# Allegro board JLINK_OB_PCB_V1_0.brd
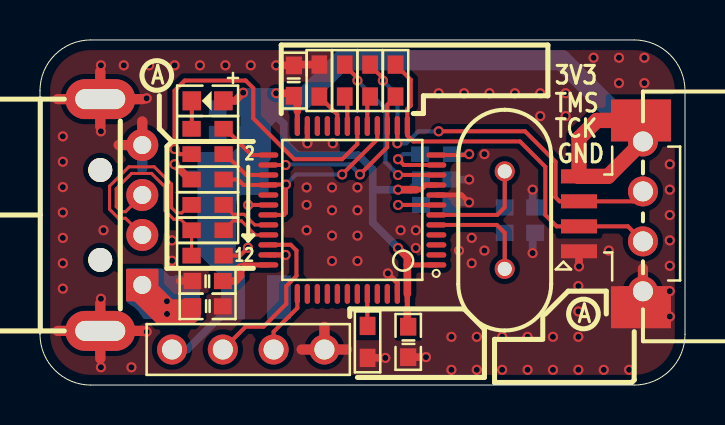
[diagram p0: board, top side]
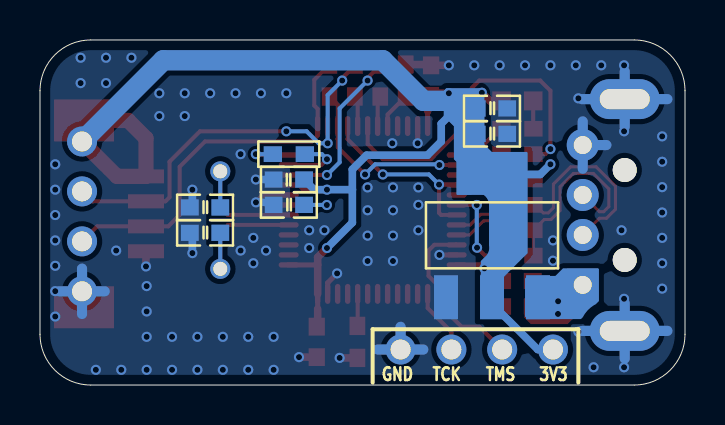
[diagram p1: board, bottom side, seen from below]

Outline 32.26 x 17.27 mm; copper layers: TOP, BOTTOM. Coordinates in mm from the lower left corner of the outline.
Outline path: 0,14.73 0,2.54 arc(0.74,0.74) 2.54,0 29.72,0 arc(31.51,0.74) 32.26,2.54 32.26,14.73 arc(31.51,16.53) 29.72,17.27 2.54,17.27 arc(0.74,16.53) 0,14.73

## Design rules (mm)
net group 90OHM: nets N04919 N04923
net group 90OHM2: nets USBD+ USBD-
net group POWER: nets 3V3 VCC_5V

## Placement (name value [footprint] x y rotation side)
C1  22pF  [C0603]  24 7.62 0 bottom
C2  22pF  [C0603]  24 8.89 0 bottom
C3  104  [C0603]  19.81 9.02 0 bottom
C4  105  [C0603]  8.38 3.94 180 top
C5  105  [C0603]  9.65 12.57 0 bottom
C6  104  [C0603]  9.65 13.84 0 bottom
C7  104  [C0603]  12.7 15.24 270 top
C8  104  [C0603]  8.38 5.21 0 top
C9  104  [C0603]  19.81 10.29 180 bottom
C10  104  [C0603]  18.41 2.16 90 top
D1  LED  [LED0603]  8.38 14.22 180 top
J1  SMT-CON-4P-1R25  [1_25_PWT_4P]  29.69 8.64 90 top
J2  SWD  [XH-2R54-4P-B]  30.15 12.19 270 top
J3  CON4  [SIP-4]  14.22 1.78 180 top
R1  100R  [R0603]  15.24 15.24 90 top
R2  100R  [R0603]  8.38 11.56 0 top
R3  100R  [R0603]  16.51 15.24 270 top
R4  100R  [R0603]  17.78 15.24 270 top
R5  100R  [R0603]  19.81 11.56 180 bottom
R6  10k  [R0603]  8.38 10.29 180 top
R7  1k  [R0603]  8.38 12.83 180 top
R8  10k  [R0603]  13.97 15.24 90 top
R9  10k  [R0603]  16.38 2.16 270 top
R10  22R  [R0603]  8.38 9.02 0 top
R11  22R  [R0603]  8.38 7.75 0 top
R12  1.5k  [R0603]  8.38 6.48 0 top
U1  STM32F103C8T6  [LQFP-48]  15.62 8.76 180 top
U2  AMS1117-3V3  [SOT-223]  9.65 7.49 180 bottom
USB1  USB_A_M  [USB-A-M-DIP]  5.12 5.01 180 top
Y1  8M  [HC-49S]  23.24 8.26 270 top

## Library data of the parts
C1-C10 = CAP NP
D1 = LED
J1 = SMT-CON-4P-1R25
J2 J3 = CON4
R1-R12 = R
U1 = STM32F103C8T6_6
U2 = AMS1117-3V3_0
USB1 = USB_A
Y1 = CRYSTAL_0

## Footprints (pads in the part's own frame, mm; a bottom-side part is the same pattern mirrored in y, then rotated)
1_25_PWT_4P
  rect 0.701x1.801 smd: 1(-1.941,2.731) 2(-0.693,2.731) 3(0.559,2.731) 4(1.808,2.731)
  rect 2.101x3 smd: 5(-4.742,-0.368) 6(4.608,-0.368)
C0603
  rect 0.889x0.813 smd: 1(-0.762,0) 2(0.762,0)
HC-49S
  round 1.001 hole 0.701: 1(-2.441,0) 2(2.441,0)
LED0603
  rect 0.93x0.95 smd: 1(-0.79,0) 2(0.79,0)
LQFP-48
  oval 1.001x0.269 smd: 1(-4.201,2.751) 2(-4.201,2.25) 3(-4.201,1.75) 4(-4.201,1.25) 5(-4.201,0.749) 6(-4.201,0.249) 7(-4.201,-0.249) 8(-4.201,-0.749) 9(-4.201,-1.25) 10(-4.201,-1.75) 11(-4.201,-2.25) 12(-4.201,-2.751) 25(4.201,-2.751) 26(4.201,-2.25) 27(4.201,-1.75) 28(4.201,-1.25) 29(4.201,-0.749) 30(4.201,-0.249) 31(4.201,0.249) 32(4.201,0.749) 33(4.201,1.25) 34(4.201,1.75) 35(4.201,2.25) 36(4.201,2.751)
  oval 0.269x1.001 smd: 13(-2.751,-4.201) 14(-2.25,-4.201) 15(-1.75,-4.201) 16(-1.25,-4.201) 17(-0.749,-4.201) 18(-0.249,-4.201) 19(0.249,-4.201) 20(0.749,-4.201) 21(1.25,-4.201) 22(1.75,-4.201) 23(2.25,-4.201) 24(2.751,-4.201) 37(2.751,4.201) 38(2.25,4.201) 39(1.75,4.201) 40(1.25,4.201) 41(0.749,4.201) 42(0.249,4.201) 43(-0.249,4.201) 44(-0.749,4.201) 45(-1.25,4.201) 46(-1.75,4.201) 47(-2.25,4.201) 48(-2.751,4.201)
R0603
  rect 0.914x0.787 smd: 1(-0.8,0) 2(0.8,0)
SIP-4
  round 1.501 hole 1.001: 1(0,0) 2(2.54,0) 3(5.08,0) 4(7.62,0)
SOT-223
  rect 1.199x2.2 smd: 1(-2.301,-3.099) 2(0,-3.099) 3(2.301,-3.099)
  rect 3.5x2.149 smd: 4(0,3.099)
USB-A-M-DIP
  round 1.199 hole 1.199 unplated: (2.101,-1.25) (2.101,-5.751)
  rect 1.6x1.6 hole 0.899: 1(0,0)
  round 1.6 hole 0.899: 2(0,-2.499) 3(0,-4.501) 4(0,-7)
  oval 3.5x1.999 hole 2.499x1.001: 5(2.101,2.301) 6(2.101,-9.299)
XH-2R54-4P-B
  round 1.501 hole 1.001: 1(0,0) 2(2.499,0) 3(5.001,0) 4(7.501,0)

## Nets
3V3: C5.2 C6.2 C7.2 C8.2 C9.2 C10.2 D1.1(A) J1.4 J1.6 J2.1 J3.4 R6.2 U1.1(VBAT) U1.9(VDDA) U1.24(VDD_1) U1.36(VDD_2) U1.48(VDD_3) U2.2(OUT0) U2.4(OUT1)
GND: C1.2 C2.2 C3.2 C4.1 C5.1 C6.1 C7.1 C8.1 C9.1 C10.1 J1.1 J1.5 J2.4 J3.1 R8.2 R9.2 U1.8(VSSA) U1.23(VSS_1) U1.35(VSS_2) U1.47(VSS_3) U2.1(GND) USB1.4(GND) USB1.5 USB1.6
VCC_5V: C4.2 U2.3(IN) USB1.1(VCC)
JTCK: J3.2 U1.37(PA14)
JTMS: J3.3 U1.34(PA13)
LED: R7.1 U1.25(PB12)
NRST: C3.1 U1.7(NRST)
TCKIN: J1.2 J2.3 R4.1 U1.13(PA3)
TCKOUT: R4.2 U1.15(PA5) U1.26(PB13)
TDIIN: R2.1 U1.18(PB0)
TDIOUT: R2.2 U1.27(PB14)
TDOIN: R6.1 U1.16(PA6) U1.28(PB15) U1.31(PA10)
TMSIN: J1.3 J2.2 R3.1 U1.14(PA4)
TMSOUT: R3.2 U1.17(PA7)
TRESIN: R5.1 U1.12(PA2)
TRESOUT: R5.2 U1.11(PA1)
TRSTIN: R1.1 U1.19(PB1)
TRSTOUT: R1.2 U1.10(PA0-WKUP)
USBD+: R11.2 U1.33(PA12)
USBD-: R10.2 U1.32(PA11)
USBD_EN: R12.2 U1.30(PA9)
N00624: R8.1 U1.20(PB2/BOOT1)
N00724: C1.1 U1.5(PD0-OSC_IN) Y1.2
N00728: C2.1 U1.6(PD1) Y1.1
N00767: R9.1 U1.44(BOOT0)
N04919: R10.1 USB1.2(D-)
N04923: R11.1 R12.1 USB1.3(D+)
N05966: D1.2(K) R7.2

Pads without a net: U1 2 3 4 21 22 29 38 39 40 41 42 43 45 46

## Via types
v1: diameter 0.508, hole 0.305, TOP to BOTTOM, 114 vias

## Routing (per net, layer and track width the routed paths; a pad name or vN(x,y) marks a point on that pad's centre or on a via; arc(x,y) is an arc through that point)
3V3: length 66.9
  TOP w0.254: v1(10.03,5.84) 10.2,6.01 U1.36 ; 18.82,9.78 19.05,9.78 19.28,10.01 U1.9 ; 18.37,6.01 18.37,6.01 U1.1 ; U1.24 12.87,13.72 ; U1.48 18.37,3.81
  TOP w0.381: C10.2 18.37,2.96 18.37,3.81 ; U1.48 18.37,6.39 v1(17.91,6.86) ; 12.87,13.72 12.87,14.31 C7.2 12.57,14.61 v1(11.81,14.61) ; C8.2 9.78,5.21 10.03,5.46 v1(10.03,5.84) ; D1.1 9.75,14.22 v1(10.16,14.63) ; R6.2 7.49,10.29 v1(6.73,11.05) ; 18.82,9.78 v1(17.91,9.78)
  TOP w0.762: J2.1 28.41,10.44 J1.4 26.96,12.35 27.85,13.24 J1.6
  BOTTOM w0.381: C9.2 18.54,9.78 v1(17.91,9.78) 16.64,9.78 ; J3.4 7.37,1.78 9.65,4.06 U2.2 ; 16.64,9.78 16.64,8.13 v1(17.91,6.86) ; 16.64,9.78 16.64,10.79 15.93,11.5 12.88,11.5 12.19,12.19 12.19,13.08 11.81,13.46 ; U2.4 9.6,10.54 7.24,10.54 v1(6.73,11.05)
  BOTTOM w1.016: 11.43,14.22 13.08,14.22 15.11,16.26 26.09,16.26 J2.1
GND: length 63.9
  TOP w0.254: U1.23 v1(13.37,12.1) ; v1(17.4,5.59) 17.87,5.12 U1.47 ; U1.8 21.09,9.51 v1(21.46,9.14) ; U1.35 v1(12.28,6.51)
  TOP w0.381: C10.1 v1(19.3,1.4) ; v1(11.81,16) C7.1 12.74,16.04 R8.2 ; J1.1 v1(26.96,5.94) ; R9.2 v1(17.27,1.36) ; 6.99,5.21 C8.1
  TOP w0.508: 3.93,12.01 USB1.4 5.12,13.2 ; 13.09,1.78 J3.1 ; J3.1 14.22,2.91 ; J3.1 15.36,1.78 ; 30.15,3.56 J2.4 ; J2.4 29.02,4.69 ; J2.4 30.15,5.83 ; J2.4 31.29,4.69 ; USB1.5 5.15,2.71 ; USB1.5 3.01,4.09 ; USB1.5 3.01,1.33 ; USB1.5 0.88,2.71 ; 3.01,12.93 USB1.6 ; USB1.6 5.15,14.31 ; USB1.6 0.88,14.31 ; USB1.6 3.01,15.69
  BOTTOM w0.381: C2.2 24.64,9.02 v1(24.64,9.78) ; v1(21.46,9.14) 20.7,9.14 C3.2 ; C9.1 v1(21.46,10.29) ; v1(24.64,6.6) 24.64,7.49 C1.2
  BOTTOM w0.508: USB1.4 5.12,13.2 ; USB1.4 3.93,12.01 ; USB1.4 5.12,10.83 ; 0.88,2.71 USB1.5 ; USB1.5 3.01,4.09 ; USB1.5 5.15,2.71 ; USB1.5 3.01,1.33 ; J2.4 31.29,4.69 ; J2.4 29.02,4.69 ; J2.4 30.15,3.56 ; J2.4 30.15,5.83 ; 13.09,1.78 J3.1 ; J3.1 14.22,2.91 ; J3.1 15.36,1.78 ; 0.88,14.31 USB1.6 ; USB1.6 3.01,15.69 ; USB1.6 5.15,14.31 ; USB1.6 3.01,12.93
  vias: v1(1.14,12.45) v1(1.14,11.18) v1(1.14,9.91) v1(1.14,8.64) v1(1.14,7.37) v1(1.14,6.1) v1(1.14,4.83) v1(3.05,16) v1(3.05,12.7) v1(3.05,4.32) v1(3.05,0.89) v1(3.17,7.75) v1(4.19,16) v1(4.57,0.89) v1(5.33,14.35) v1(5.33,2.67) v1(5.46,16) v1(6.6,7.24) v1(6.6,6.22) v1(6.73,16) v1(8,16) v1(9.27,16) v1(10.54,16) v1(13.34,9.89) v1(13.34,9.02) v1(13.34,7.75) v1(14.64,12.1) v1(14.61,9.89) v1(14.61,8.75) v1(14.61,7.48) v1(14.61,6.21) v1(15.88,9.89) v1(15.88,8.75) v1(15.88,7.48) v1(15.88,6.21) v1(18.03,7.75) v1(18.8,7.75) v1(18.8,6.86) v1(19.94,14.61) v1(20.57,2.41) v1(20.57,0.76) v1(20.95,6.73) v1(21.21,14.61) v1(21.59,7.37) v1(21.59,6.1) v1(21.84,2.41) v1(21.84,0.76) v1(22.23,11.56) v1(22.23,6.73) v1(22.48,14.61) v1(23.11,2.41) v1(23.11,0.76) v1(23.75,14.61) v1(24.38,2.41) v1(24.38,0.76) v1(25.02,14.61) v1(25.02,13.46) v1(25.65,2.41) v1(25.65,0.76) v1(26.29,14.61) v1(26.29,13.46) v1(26.92,4.95) v1(26.92,3.68) v1(26.92,2.41) v1(26.92,0.76) v1(27.69,16.38) v1(28.19,0.76) v1(28.45,6.73) v1(28.96,16.38) v1(28.96,15.11) v1(29.46,0.76) v1(30.23,16.38) v1(30.23,15.11) v1(31.5,11.05) v1(31.5,9.78) v1(31.5,8.51) v1(31.5,7.24) v1(31.5,5.97) v1(31.5,4.7) v1(31.5,3.43)
VCC_5V:
  vias: v1(6.35,4.19) v1(6.35,3.56)
JTCK: length 3.3
  TOP w0.203: U1.37 12.87,3.85 11.68,2.67 J3.2
JTMS: length 8.5
  TOP w0.203: U1.34 11.43,7.02 12.54,7.02 12.83,6.73 12.83,5.46 12.32,4.95 12.32,4.06 11.18,2.92 10.29,2.92 J3.3
LED: length 2.8
  TOP w0.203: R7.1 9.27,12.83 10.58,11.51 U1.25
NRST: length 3.1
  TOP w0.203: U1.7 v1(17.91,9.01)
  BOTTOM w0.203: v1(17.91,9.01) 17.92,9.02 C3.1
TCKIN: length 19.3
  TOP w0.203: J2.3 29.4,7.94 J1.2 25.84,7.94 25.27,8.51 25.27,10.92 24,12.19 18.67,12.19 18.37,12.49 U1.13 18.37,13.82 18.54,13.99 18.54,15.28 R4.1
TCKOUT: length 9.4
  TOP w0.203: v1(16,10.54) 17.36,11.9 17.36,12.31 17.37,12.32 U1.15 17.37,14.03 R4.2 ; U1.26 v1(12.28,11.01)
  BOTTOM w0.203: v1(12.28,11.01) 12.32,11.05 15.49,11.05 v1(16,10.54)
TDIIN: length 17
  TOP w0.203: R2.1 6.99,11.56 v1(6.73,11.81) 6.73,14.73 7.24,15.24 10.29,15.24 10.67,14.86 10.67,13.35 12.71,11.3 15.11,11.3 15.87,12.06 U1.18
TDIOUT: length 2.7
  TOP w0.203: U1.27 10.31,10.51 9.27,11.56 R2.2
TDOIN: length 11.8
  TOP w0.203: U1.16 16.87,12.3 v1(15.11,10.54) ; U1.31 12.2,8.51 12.3,8.62 v1(12.3,10.03) 11.44,10.03 U1.28 10.18,10.01 9.91,10.29 R6.1
  BOTTOM w0.203: v1(15.11,10.54) 12.81,10.54 v1(12.3,10.03)
TMSIN: length 20.6
  TOP w0.203: R3.1 16.51,16 17.14,15.37 v1(17.14,15.24) ; U1.14 v1(17.87,12.1) ; J2.2 29.66,9.19 J1.3 25.98,9.19 25.78,9.4 25.78,11.18 24.26,12.7 v1(19.94,12.7)
  BOTTOM w0.203: v1(19.94,12.7) 18.92,12.7 18.32,12.1 v1(17.87,12.1) 17.87,14.51 v1(17.14,15.24)
TMSOUT: length 1.5
  TOP w0.203: R3.2 16.37,14.3 U1.17
TRESIN: length 2.5
  TOP w0.203: U1.12 21.42,11.51 v1(21.46,11.56)
  BOTTOM w0.203: R5.1 v1(21.46,11.56)
TRESOUT: length 3.2
  TOP w0.203: U1.11 18.2,11.01 v1(17.91,11.3)
  BOTTOM w0.203: R5.2 18.16,11.56 v1(17.91,11.3)
TRSTIN: length 1.5
  TOP w0.203: R1.1 15.37,14.31 U1.19
TRSTOUT: length 8.5
  TOP w0.203: R1.2 15.24,16 15.88,15.37 v1(15.88,15.24) ; v1(17.91,10.51) U1.10
  BOTTOM w0.203: v1(15.88,15.24) 17.27,13.84 17.27,11.15 v1(17.91,10.51)
USBD+: length 2.7
  TOP w0.152: U1.33 10.77,7.51 10.07,8.22 9.65,8.22 R11.2
USBD-: length 2.7
  TOP w0.152: U1.32 10.74,8.01 10.21,8.55 9.65,8.55 R10.2
USBD_EN: length 4.5
  TOP w0.203: v1(10.4,6.87) 10.01,6.48 R12.2 ; U1.30 v1(10.41,9.01)
  BOTTOM w0.203: v1(10.41,9.01) 10.41,6.89 v1(10.4,6.87)
N00624: length 1.8
  TOP w0.203: R8.1 14.87,13.54 U1.20
N00724: length 7.2
  TOP w0.203: Y1.2 C1.1 22.85,8.01 U1.5
  BOTTOM w0.203: C1.1 Y1.2
N00728: length 7.2
  TOP w0.203: Y1.1 C2.1 22.87,8.51 U1.6
  BOTTOM w0.203: C2.1 Y1.1
N00767: length 1.6
  TOP w0.203: R9.1 16.37,2.97 U1.44
N04919: length 9.6
  TOP w0.152: R10.1 7.49,9.02 7.09,8.62 6.84,8.62 6.58,8.87 6.58,10.06 5.71,10.92 4.45,10.92 3.48,9.96 3.48,8.79 3.93,8.35 4.28,8.35 USB1.2
N04923: length 9.9
  TOP w0.152: USB1.3 4.28,8.68 4.06,8.68 3.81,8.93 3.81,9.82 4.58,10.59 5.58,10.59 6.25,9.92 6.25,8.74 6.7,8.29 7.04,8.29 R11.1 R12.1
N05966: length 1.4
  TOP w0.203: D1.2 7.59,12.84 R7.2

## Copper pours and planes (outline as drawn; the poured copper is in the pictures)
3V3 on BOTTOM (solid shape): 11.92,14.86 11.94,14.86 11.95,14.84 12.05,14.75 12.06,14.73 12.06,14.71 12.06,13.46 11.56,12.95 11.56,11.3 11.45,11.19 11.43,11.17 11.43,11.16 11.43,9.58 11.42,9.54 11.38,9.53 10.76,9.53 10.74,9.53 10.12,9.55 9.8,9.01 9.8,6.99 9.82,6.67 10.01,6.41 10.21,6.2 10.21,3.35 10.16,3.3 9.16,3.3 9.14,3.31 9.13,3.32 9.06,3.39 9.06,5.42 7.89,6.59 7.88,6.61 7.87,6.62 7.87,11.61 7.89,11.64 7.92,11.66 9.65,11.66 10.03,12.04 10.03,14.71 10.04,14.73 10.05,14.75 10.14,14.84 10.16,14.85 10.18,14.86
GND on TOP: 2.54,0.51 1.1,1.1 0.51,2.54 0.51,14.73 1.1,16.17 2.54,16.76 29.72,16.76 31.15,16.17 31.75,14.73 31.75,2.54 31.15,1.1 29.72,0.51 ; 7 cut-outs
GND on BOTTOM: 2.54,0.51 1.1,1.1 0.51,2.54 0.51,14.73 1.1,16.17 2.54,16.76 29.72,16.76 31.15,16.17 31.75,14.73 31.75,2.54 31.15,1.1 29.72,0.51 ; 4 cut-outs
VCC_5V on TOP (solid shape): 5.92,5.71 5.92,4.98 6.61,4.29 8,4.29 8.04,4.25 8.04,3.39 7.7,3.05 5.87,3.05 4.72,4.19 4.34,4.19 4.32,4.21 4.32,5.74 4.37,5.79 5.84,5.79
VCC_5V on BOTTOM (solid shape): 6.08,5.84 6.1,5.84 6.11,5.83 6.46,5.48 6.48,5.47 6.5,5.46 7.85,5.46 7.87,5.46 7.89,5.45 7.99,5.35 8,5.33 8,5.31 8,3.45 8,3.43 7.99,3.41 7.89,3.32 7.87,3.31 7.85,3.3 5.23,3.3 5.21,3.31 5.19,3.32 5.11,3.4 5.11,3.41 4.83,3.78 4.46,4.05 4.46,4.05 4.33,4.18 4.32,4.19 4.32,4.21 4.32,5.79 4.33,5.83 4.37,5.84

## Text on the board
Ref Des/Silkscreen Bottom: 3V3 | TMS | TCK | GND
Ref Des/Silkscreen Top: 12 | 2 | A | 3V3 | TMS | TCK | GND
COMPVAL_TYPE_BOTTOM: FIGURE | SIZE | 12.0 | 27.6 | 35.4 | 39.4 | 47.2 | 98.4x39.4 | DRILL CHART: TOP to BOTTOM | ALL UNITS ARE IN MILS | PLATED | NON-PLATED | QTY | 114 | 2 | 1 | 3 | 8
